# Altium PCB DuinoTag.PcbDoc
Units mil, origin at the board's own origin, x right, y up, seen from the top; angles counter-clockwise.
Board outline 1338.58 x 1338.58 mil, 2 copper layers (Top Layer, Bottom Layer); 11 components, 6 nets, 33 pads, 1 vias.
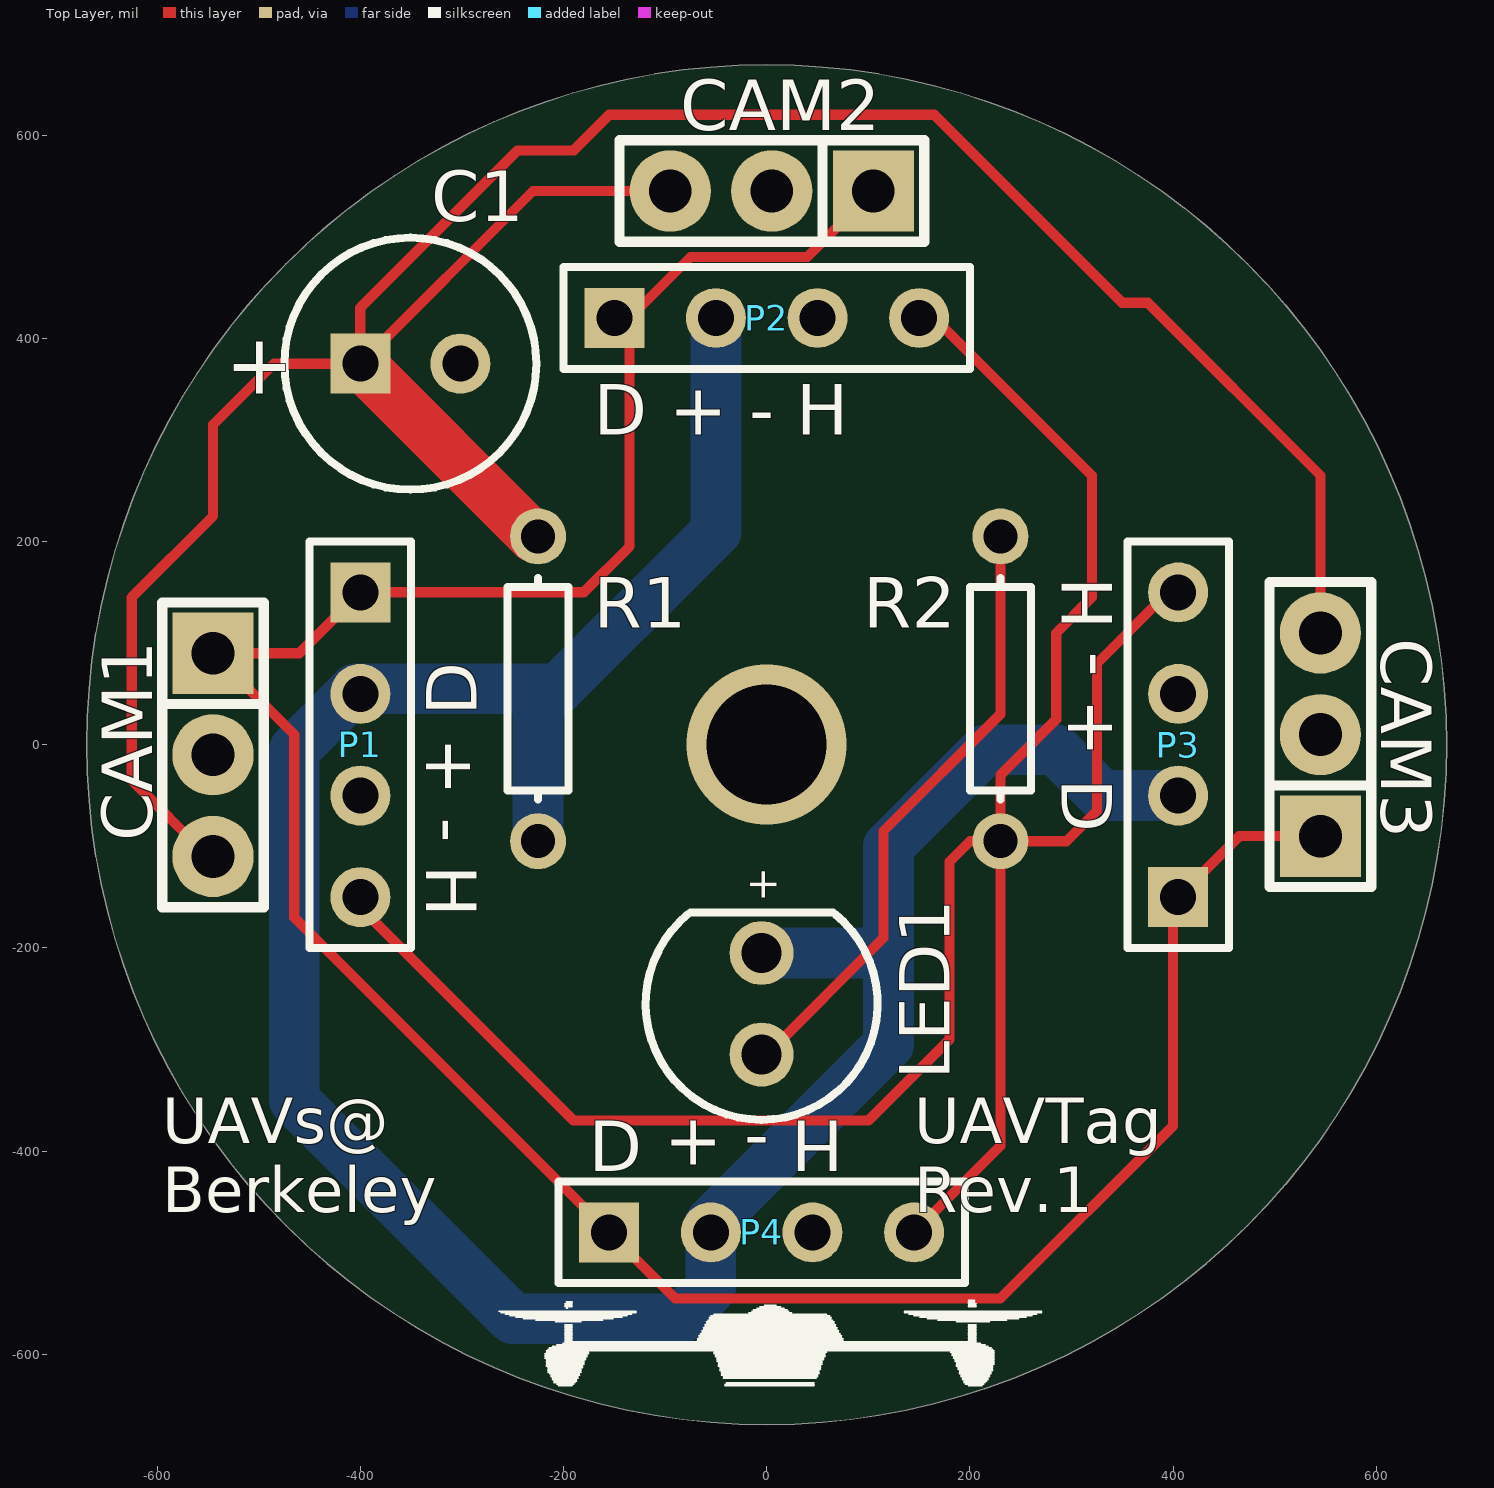
[diagram p0: Top Layer view]
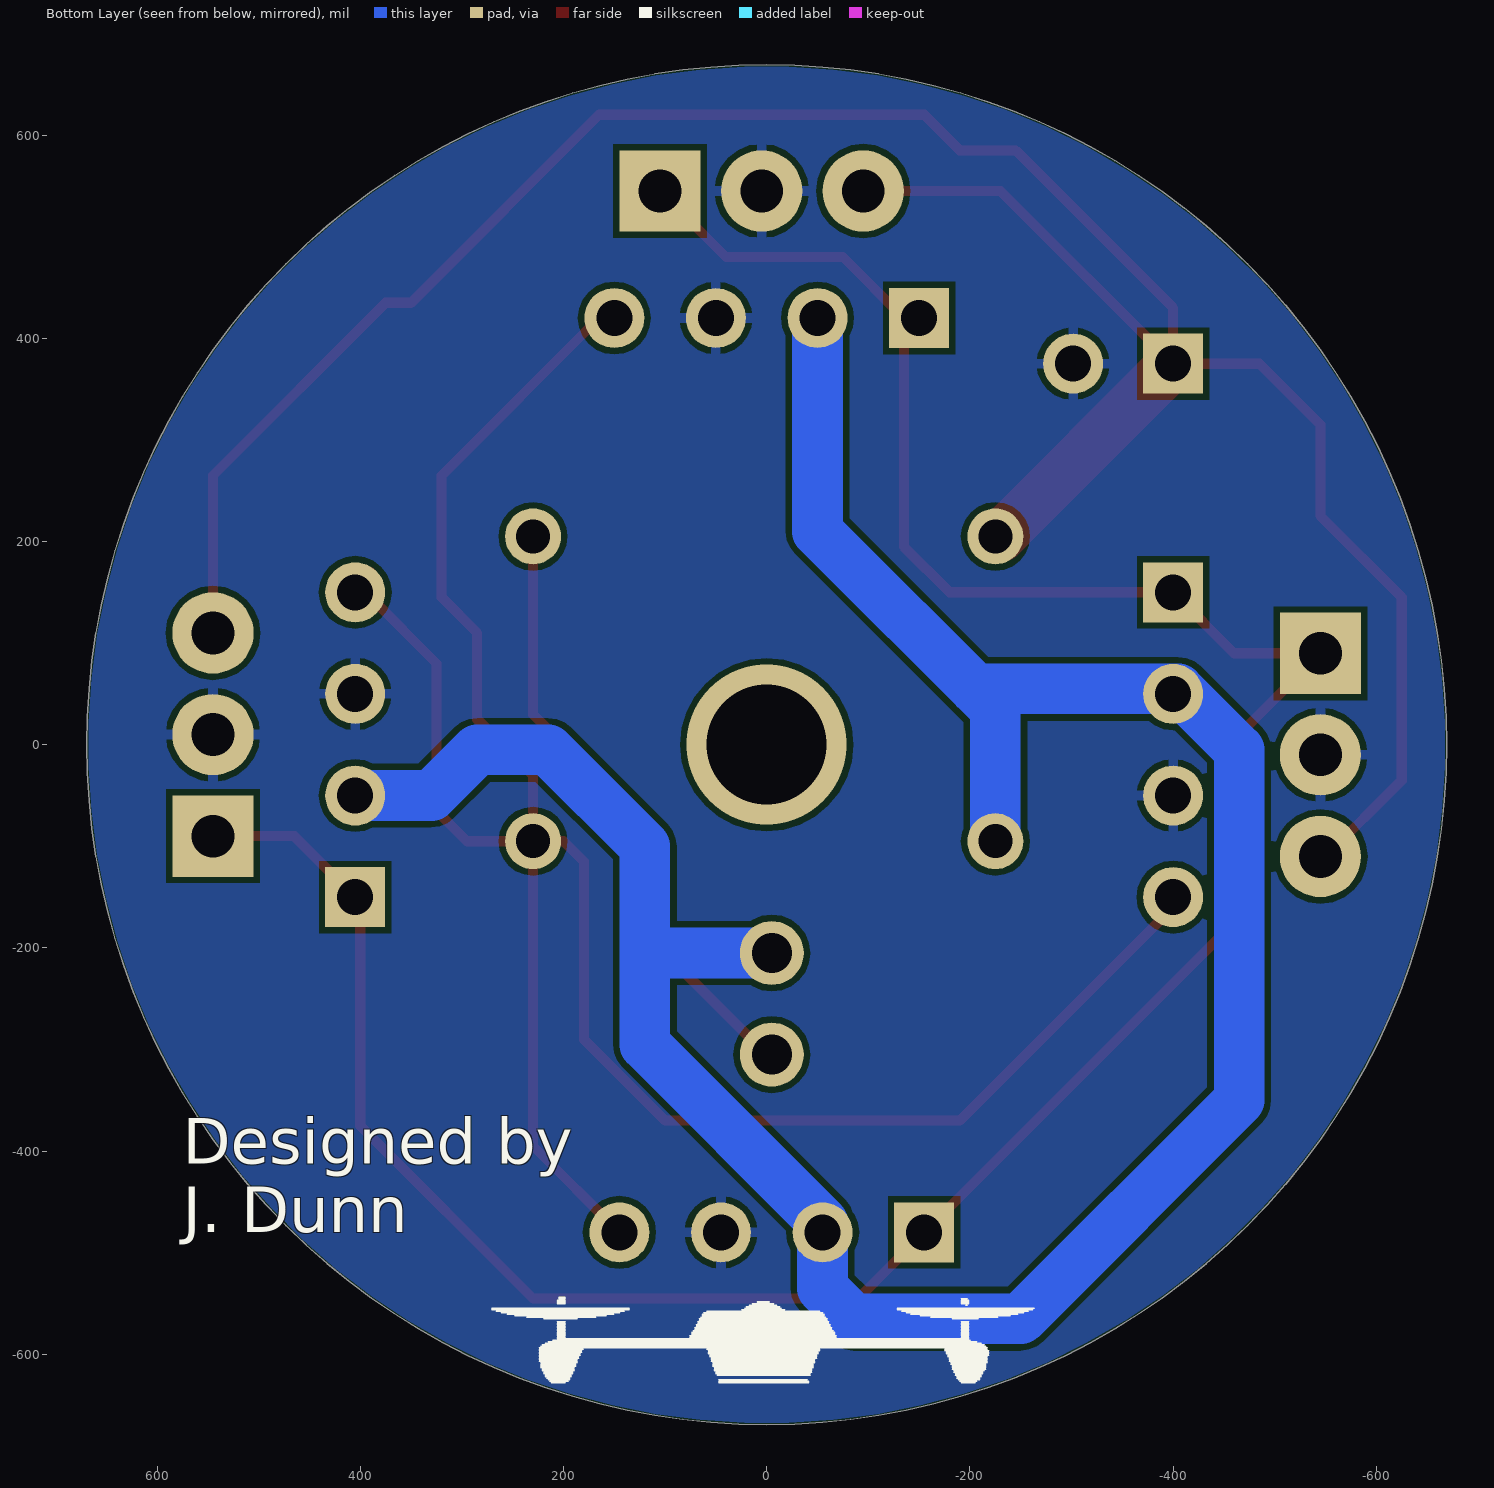
[diagram p1: Bottom Layer view, seen from below]

## Layer stack, top to bottom
Top Solder: solder mask 0.4, Solder Resist, Dk 3.5
Top Layer: signal copper 1.4
Dielectric 1: dielectric 12.6, FR-4, Dk 4.8
Bottom Layer: signal copper 1.4
Bottom Solder: solder mask 0.4, Solder Resist, Dk 3.5

## Board outline
-669.29,0 ccw(c0,0) 0,-669.29 ccw(c0,0) 669.29,0 ccw(c0,0) 0,669.29 ccw(c0,0)

## Design rules (kind name [scope] priority, off if disabled: settings)
Clearance [All] p1: gap=6
HoleSize [All] p1: absolutevalues=TRUE maxlimit=300 minlimit=1 maxpercent=80.000 minpercent=20.000
MinimumSolderMaskSliver [All] p1: minsoldermaskwidth=0
PolygonConnect [All] p1: connectstyle=Relief reliefconductorwidth=10 reliefentries=4 polygonreliefangle="90 Angle" airgapwidth=6
RoutingVias [All] p1: holewidth=28 width=50 viastyle="Through Hole" minholewidth=28 minwidth=50 maxholewidth=28 maxwidth=50
SilkToSilkClearance [All] p1: silktosilkclearance=0
SilkToSolderMaskClearance [IsPad] p1: minsilkscreentomaskgap=0 clearancetoexposedcopper=TRUE
SolderMaskExpansion [All] p1: expansion=4
Width [All] p1: maxlimit=50 minlimit=6 preferedwidth=50 toplayer_prefwidth=10 minimp=50.000000 maximp=50.000000 favimp=50.000000
26 further rules are at their usual default settings.

## Components (designator, comment, footprint, x,y, rotation, side; value= is the part's Value field where it differs from the comment)
C1 "Cap Pol1" 94SP-C -350.79,375 r0 top
CAM1 "IR CAMERA" SIP3 -545,90 r270 top
CAM2 "IR CAMERA" SIP3 105,545 r180 top
CAM3 "IR CAMERA" SIP3 545,-90 r90 top
LED1 "HIT LED" "Type 5mm" -5,-255 r90 top (schematic designator D1)
P1 "Header 4" HDR1X4 -400,150 r270 top
P2 "Header 4" HDR1X4 -150,420 r0 top
P3 "Header 4" HDR1X4 405,-150 r90 top
P4 "Header 4" HDR1X4 -155,-480 r0 top
R1 "Res1" AXIAL-0.3 -225,55 r90 top
R2 "Res1" AXIAL-0.3 230,55 r90 top

## Footprints (in the part's own frame and the unit in brackets; to place one, negate y for a bottom-side part, rotate by r counter-clockwise, add the part's x,y. Pads: shape width x height; smd on the part's side, far side on the other; paste and mask are expansions set on the pad)
94SP-C [mm] "Capacitor, Electrolytic, Radial; Body 6.3 x 6.8 mm (Dia.xH typ); Pin Spacing 2.5 mm (typ)"
  rect 1.5x1.5 hole 0.9: 1(-1.25,0)
  round 1.5 hole 0.9: 2(1.25,0)
  silkscreen extent -3.15,-3.15 3.15,3.15
AXIAL-0.3 [mm] "Axial Device, Thru-Hole; 2 Leads; 0.3 in Pin Spacing"
  round 1.4 hole 0.85: 1(-3.81,0) 2(3.81,0)
  silkscreen extent -2.77,-0.76 2.77,0.76
HDR1X4 [mm] "Connector; Header; 4 Position"
  rect 1.5x1.5 hole 0.9: 1(0,0)
  round 1.5 hole 0.9: 2(2.54,0) 3(5.08,0) 4(7.62,0)
  silkscreen extent -1.27,-1.27 8.89,1.27
SIP3 [mil]
  rect 80x80 hole 42: 1(0,0)
  round 80 hole 42: 2(100,0) 3(200,0)
  silkscreen extent -50,-50 250,50
"Type 5mm" [mm] "THT, LED-5mm, 2pin- Body 5.8mm"
  round 1.6 hole 1: 1(1.27,0) 2(-1.27,0)
  silkscreen extent -2.9,-2.9 2.29,2.9, body extent -2.9,-2.9 2.5,2.9, height 11.7

## Part data
C1: "Polarized Capacitor (Radial)"
CAM1 CAM2 CAM3: library part "HEADER 3", "CONN HEADR BRKWAY .100 3POS STR"
LED1: library part LED1, "Typical RED GaAs LED"
P1 P2 P3 P4: "Header, 4-Pin"
R1 R2: "Resistor"

## Via types
v1: diameter 157.48, hole 118.11, Top Layer to Bottom Layer, 1 vias

## Nets (pads, with @x,y where several pads share a name; then routed paths per layer and width w, separated by ;. In a path a pad name is that pad's centre, name@x,y a point inside that pad or via, vN(x,y) a via of type N, cw(c..) or ccw(c..) an arc to the next point about the centre after c; other vN are vias at no path point)
5V: LED1.1 P1.2 P2.2 P3.2 P4.2 R1.1 | length 2669.3
  Bottom Layer w50: R1.1 -225,35 -50,210 P2.2@-50,405 ; -205,55 -405,55 -465,-5 -465,-350 -250,-565 -85,-565 -55,-535 P4.2 -55,-470 120,-295 120,-100 215,-5 285,-5 330,-50 P3.2@390,-50 ; LED1.1@0,-205 120,-205
DATA: CAM1.1 CAM2.1 CAM3.1 P1.1 P2.1 P3.1 P4.1 | length 2761.1
  Top Layer w10: CAM2.1@105,555 CAM2.1 40,480 -75,480 -135,420 -135,195 -180,150 P1.1 -460,90 CAM1.1 -465,10 -465,-170 -90,-545 230,-545 400,-375 400,-155 465,-90 CAM3.1@550,-90
GND: C1.2 CAM1.2 CAM2.2 CAM3.2 P1.3 P2.3 P3.3 P4.3
HIT: P1.4 P2.4 P3.4 P4.4 R2.1 | length 2339.4
  Top Layer w10: P1.4@-400,-160 -190,-370 100,-370 180,-290 180,-115 200,-95 295,-95 325,-65 325,80 390,145 P3.4@390,170 ; P4.4 230,-395 230,-30 285,25 285,110 320,145 320,265 P2.4@165,420
NetC1_1: C1.1 CAM1.3 CAM2.3 CAM3.3 R1.2 | length 2673.9
  Top Layer w10: CAM1.3@-550,-110 -625,-35 -625,145 -545,225 -545,315 -485,375 C1.1 ; C1.1@-380,370 C1.1@-375,375 ; R1.2@-230,205 R1.2 ; CAM2.3@-95,555 -105,545 -230,545 C1.1 ; CAM3.3@550,110 545,115 545,265 375,435 350,435 165,620 -155,620 -190,585 -245,585 -400,430 C1.1
  Top Layer w50: C1.1 R1.2@-230,205
NetLED1_2: LED1.2 R2.2 | length 611.5
  Top Layer w10: LED1.2@0,-305 115,-190 115,-85 230,30 230,190 R2.2@245,205
copper on no net:
  other v1: 0,0

## Polygon pours and split planes (outlines as drawn)
GND on Bottom Layer "GND_L02_P001" (solid, remove dead copper, pour order 1): -667.32,0 ccw(c0,0) 0,-667.32 ccw(c0,0) 667.32,0 ccw(c0,0) 0,667.32 ccw(c0,0)

## Silkscreen, mask and mechanical layers (free items; w line width, h text height)
Top Overlay:
  lines w1.5: -263.5,-557.5 -128.5,-557.5 ; -262,-559 -128.5,-559 ; -257.5,-560.5 -133,-560.5 ; -253,-562 -137.5,-562 ; -247,-563.5 -142,-563.5 ; -239.5,-565 -151,-565 ; -227.5,-566.5 -161.5,-566.5 ; -218.5,-604 -178,-604 ; -218.5,-602.5 -176.5,-602.5 ; -218.5,-601 -176.5,-601 ; -218.5,-599.5 -175,-599.5 ; -217,-611.5 -181,-611.5 ; -217,-610 -179.5,-610 ; -217,-608.5 -179.5,-608.5 ; -217,-607 -179.5,-607 ; -217,-605.5 -178,-605.5 ; -217,-598 -175,-598 ; -217,-596.5 224,-596.5 ; -215.5,-617.5 -182.5,-617.5 ; -215.5,-616 -182.5,-616 ; -215.5,-614.5 -182.5,-614.5 ; -215.5,-613 -181,-613 ; -215.5,-595 222.5,-595 ; -214,-619 -184,-619 ; -214,-593.5 221,-593.5 ; -212.5,-622 -185.5,-622 ; -212.5,-620.5 -184,-620.5 ; -211,-625 -187,-625 ; -211,-623.5 -185.5,-623.5 ; -211,-592 218,-592 ; -209.5,-628 -188.5,-628 ; -209.5,-626.5 -187,-626.5 ; -208,-568 -182.5,-568 ; -206.5,-629.5 -190,-629.5 ; -206.5,-590.5 215,-590.5 ; -205,-631 -191.5,-631 ; -200.5,-589 210.5,-589 ; -199,-587.5 206,-587.5 ; -199,-586 -191.5,-586 ; -199,-584.5 -191.5,-584.5 ; -199,-583 -191.5,-583 ; -199,-581.5 -191.5,-581.5 ; -199,-580 -191.5,-580 ; -199,-578.5 -191.5,-578.5 ; -199,-577 -191.5,-577 ; -199,-575.5 -191.5,-575.5 ; -199,-574 -191.5,-574 ; -199,-572.5 -191.5,-572.5 ; -199,-571 -191.5,-571 ; -199,-553 -191.5,-553 ; -199,-551.5 -191.5,-551.5 ; -199,-550 -191.5,-550 ; -197.5,-554.5 -196,-554.5 ; -197.5,-548.5 -191.5,-548.5 ; -68.5,-586 75.5,-586 ; -68.5,-584.5 75.5,-584.5 ; -67,-583 74,-583 ; -67,-581.5 74,-581.5 ; -65.5,-580 72.5,-580 ; -64,-578.5 71,-578.5 ; -64,-577 71,-577 ; -62.5,-575.5 69.5,-575.5 ; -62.5,-574 69.5,-574 ; -61,-572.5 68,-572.5 ; -61,-571 68,-571 ; -59.5,-569.5 66.5,-569.5 ; -59.5,-568 66.5,-568 ; -58,-566.5 65,-566.5 ; -56.5,-565 63.5,-565 ; -56.5,-563.5 63.5,-563.5 ; -55,-562 62,-562 ; -52,-599.5 57.5,-599.5 ; -52,-598 59,-598 ; -52,-560.5 59,-560.5 ; -50.5,-602.5 57.5,-602.5 ; -50.5,-601 57.5,-601 ; -49,-607 54.5,-607 ; -49,-605.5 56,-605.5 ; -49,-604 56,-604 ; -47.5,-611.5 53,-611.5 ; -47.5,-610 54.5,-610 ; -47.5,-608.5 54.5,-608.5 ; -46,-616 51.5,-616 ; -46,-614.5 53,-614.5 ; -46,-613 53,-613 ; -44.5,-620.5 50,-620.5 ; -44.5,-619 51.5,-619 ; -44.5,-617.5 51.5,-617.5 ; -43,-623.5 48.5,-623.5 ; -43,-622 50,-622 ; -41.5,-631 47,-631 ; -41.5,-629.5 47,-629.5 ; -40,-628 47,-628 ; -17.5,-559 24.5,-559 ; -14.5,-557.5 21.5,-557.5 ; -13,-556 20,-556 ; -10,-554.5 17,-554.5 ; -7,-553 14,-553 ; -2.5,-551.5 9.5,-551.5 ; 135.5,-559 270.5,-559 ; 135.5,-557.5 270.5,-557.5 ; 140,-560.5 266,-560.5 ; 144.5,-562 261.5,-562 ; 150.5,-563.5 255.5,-563.5 ; 158,-565 248,-565 ; 168.5,-566.5 236,-566.5 ; 180.5,-598 224,-598 ; 182,-601 224,-601 ; 182,-599.5 224,-599.5 ; 183.5,-604 224,-604 ; 183.5,-602.5 224,-602.5 ; 185,-607 224,-607 ; 185,-605.5 224,-605.5 ; 186.5,-611.5 222.5,-611.5 ; 186.5,-610 224,-610 ; 186.5,-608.5 224,-608.5 ; 186.5,-568 219.5,-568 ; 188,-614.5 222.5,-614.5 ; 188,-613 222.5,-613 ; 189.5,-619 221,-619 ; 189.5,-617.5 221,-617.5 ; 189.5,-616 222.5,-616 ; 191,-622 219.5,-622 ; 191,-620.5 219.5,-620.5 ; 192.5,-625 218,-625 ; 192.5,-623.5 218,-623.5 ; 194,-628 215,-628 ; 194,-626.5 216.5,-626.5 ; 195.5,-629.5 213.5,-629.5 ; 198.5,-631 212,-631 ; 198.5,-586 206,-586 ; 198.5,-584.5 206,-584.5 ; 198.5,-583 206,-583 ; 198.5,-581.5 206,-581.5 ; 198.5,-580 206,-580 ; 198.5,-578.5 206,-578.5 ; 198.5,-577 206,-577 ; 198.5,-575.5 206,-575.5 ; 198.5,-574 206,-574 ; 198.5,-572.5 206,-572.5 ; 198.5,-571 206,-571 ; 198.5,-553 206,-553 ; 198.5,-551.5 206,-551.5 ; 198.5,-550 206,-550 ; 198.5,-548.5 204.5,-548.5 ; 198.5,-547 204.5,-547
  text "D + - H" at -170,305 h50
  text "H - + D" at 340,165 h50 r90
  text "H - + D" at -335,-170 h50 r270
  text "D + - H" at -175,-370 h50 r180
  text "UAVs@ / Berkeley" at -595,-460 h45
  text "UAVTag / Rev.1" at 145,-460 h45
Bottom Overlay:
  lines w1.5: -263.5,-554.5 -128.5,-554.5 ; -262,-556 -128.5,-556 ; -257.5,-557.5 -133,-557.5 ; -253,-559 -137.5,-559 ; -247,-560.5 -142,-560.5 ; -239.5,-562 -151,-562 ; -227.5,-563.5 -161.5,-563.5 ; -218.5,-601 -178,-601 ; -218.5,-599.5 -176.5,-599.5 ; -218.5,-598 -176.5,-598 ; -218.5,-596.5 -175,-596.5 ; -217,-608.5 -181,-608.5 ; -217,-607 -179.5,-607 ; -217,-605.5 -179.5,-605.5 ; -217,-604 -179.5,-604 ; -217,-602.5 -178,-602.5 ; -217,-595 -175,-595 ; -217,-593.5 224,-593.5 ; -215.5,-614.5 -182.5,-614.5 ; -215.5,-613 -182.5,-613 ; -215.5,-611.5 -182.5,-611.5 ; -215.5,-610 -181,-610 ; -215.5,-592 222.5,-592 ; -214,-616 -184,-616 ; -214,-590.5 221,-590.5 ; -212.5,-619 -185.5,-619 ; -212.5,-617.5 -184,-617.5 ; -211,-622 -187,-622 ; -211,-620.5 -185.5,-620.5 ; -211,-589 218,-589 ; -209.5,-625 -188.5,-625 ; -209.5,-623.5 -187,-623.5 ; -208,-565 -182.5,-565 ; -206.5,-626.5 -190,-626.5 ; -206.5,-587.5 215,-587.5 ; -205,-628 -191.5,-628 ; -200.5,-586 210.5,-586 ; -199,-584.5 206,-584.5 ; -199,-583 -191.5,-583 ; -199,-581.5 -191.5,-581.5 ; -199,-580 -191.5,-580 ; -199,-578.5 -191.5,-578.5 ; -199,-577 -191.5,-577 ; -199,-575.5 -191.5,-575.5 ; -199,-574 -191.5,-574 ; -199,-572.5 -191.5,-572.5 ; -199,-571 -191.5,-571 ; -199,-569.5 -191.5,-569.5 ; -199,-568 -191.5,-568 ; -199,-550 -191.5,-550 ; -199,-548.5 -191.5,-548.5 ; -199,-547 -191.5,-547 ; -197.5,-551.5 -196,-551.5 ; -197.5,-545.5 -191.5,-545.5 ; -68.5,-583 75.5,-583 ; -68.5,-581.5 75.5,-581.5 ; -67,-580 74,-580 ; -67,-578.5 74,-578.5 ; -65.5,-577 72.5,-577 ; -64,-575.5 71,-575.5 ; -64,-574 71,-574 ; -62.5,-572.5 69.5,-572.5 ; -62.5,-571 69.5,-571 ; -61,-569.5 68,-569.5 ; -61,-568 68,-568 ; -59.5,-566.5 66.5,-566.5 ; -59.5,-565 66.5,-565 ; -58,-563.5 65,-563.5 ; -56.5,-562 63.5,-562 ; -56.5,-560.5 63.5,-560.5 ; -55,-559 62,-559 ; -52,-596.5 57.5,-596.5 ; -52,-595 59,-595 ; -52,-557.5 59,-557.5 ; -50.5,-599.5 57.5,-599.5 ; -50.5,-598 57.5,-598 ; -49,-604 54.5,-604 ; -49,-602.5 56,-602.5 ; -49,-601 56,-601 ; -47.5,-608.5 53,-608.5 ; -47.5,-607 54.5,-607 ; -47.5,-605.5 54.5,-605.5 ; -46,-613 51.5,-613 ; -46,-611.5 53,-611.5 ; -46,-610 53,-610 ; -44.5,-617.5 50,-617.5 ; -44.5,-616 51.5,-616 ; -44.5,-614.5 51.5,-614.5 ; -43,-620.5 48.5,-620.5 ; -43,-619 50,-619 ; -41.5,-628 47,-628 ; -41.5,-626.5 47,-626.5 ; -40,-625 47,-625 ; -17.5,-556 24.5,-556 ; -14.5,-554.5 21.5,-554.5 ; -13,-553 20,-553 ; -10,-551.5 17,-551.5 ; -7,-550 14,-550 ; -2.5,-548.5 9.5,-548.5 ; 135.5,-556 270.5,-556 ; 135.5,-554.5 270.5,-554.5 ; 140,-557.5 266,-557.5 ; 144.5,-559 261.5,-559 ; 150.5,-560.5 255.5,-560.5 ; 158,-562 248,-562 ; 168.5,-563.5 236,-563.5 ; 180.5,-595 224,-595 ; 182,-598 224,-598 ; 182,-596.5 224,-596.5 ; 183.5,-601 224,-601 ; 183.5,-599.5 224,-599.5 ; 185,-604 224,-604 ; 185,-602.5 224,-602.5 ; 186.5,-608.5 222.5,-608.5 ; 186.5,-607 224,-607 ; 186.5,-605.5 224,-605.5 ; 186.5,-565 219.5,-565 ; 188,-611.5 222.5,-611.5 ; 188,-610 222.5,-610 ; 189.5,-616 221,-616 ; 189.5,-614.5 221,-614.5 ; 189.5,-613 222.5,-613 ; 191,-619 219.5,-619 ; 191,-617.5 219.5,-617.5 ; 192.5,-622 218,-622 ; 192.5,-620.5 218,-620.5 ; 194,-625 215,-625 ; 194,-623.5 216.5,-623.5 ; 195.5,-626.5 213.5,-626.5 ; 198.5,-628 212,-628 ; 198.5,-583 206,-583 ; 198.5,-581.5 206,-581.5 ; 198.5,-580 206,-580 ; 198.5,-578.5 206,-578.5 ; 198.5,-577 206,-577 ; 198.5,-575.5 206,-575.5 ; 198.5,-574 206,-574 ; 198.5,-572.5 206,-572.5 ; 198.5,-571 206,-571 ; 198.5,-569.5 206,-569.5 ; 198.5,-568 206,-568 ; 198.5,-550 206,-550 ; 198.5,-548.5 206,-548.5 ; 198.5,-547 206,-547 ; 198.5,-545.5 204.5,-545.5 ; 198.5,-544 204.5,-544
  text "Designed by / J. Dunn" at 575,-480 h45
Mechanical 1:
  circle w10: c0,0 r669.29

## Text inside footprints (layer, text, board x,y; h text height)
C1: Top Overlay "+" at -532.87,345.47 h59.05
LED1: Top Overlay "+" at 10,-155 h30 r90; Mechanical 15 "K" at 10,-135 h30 r90